# EAGLE board PcbArtiom.fsch v33 (EAGLE 9.7.0)
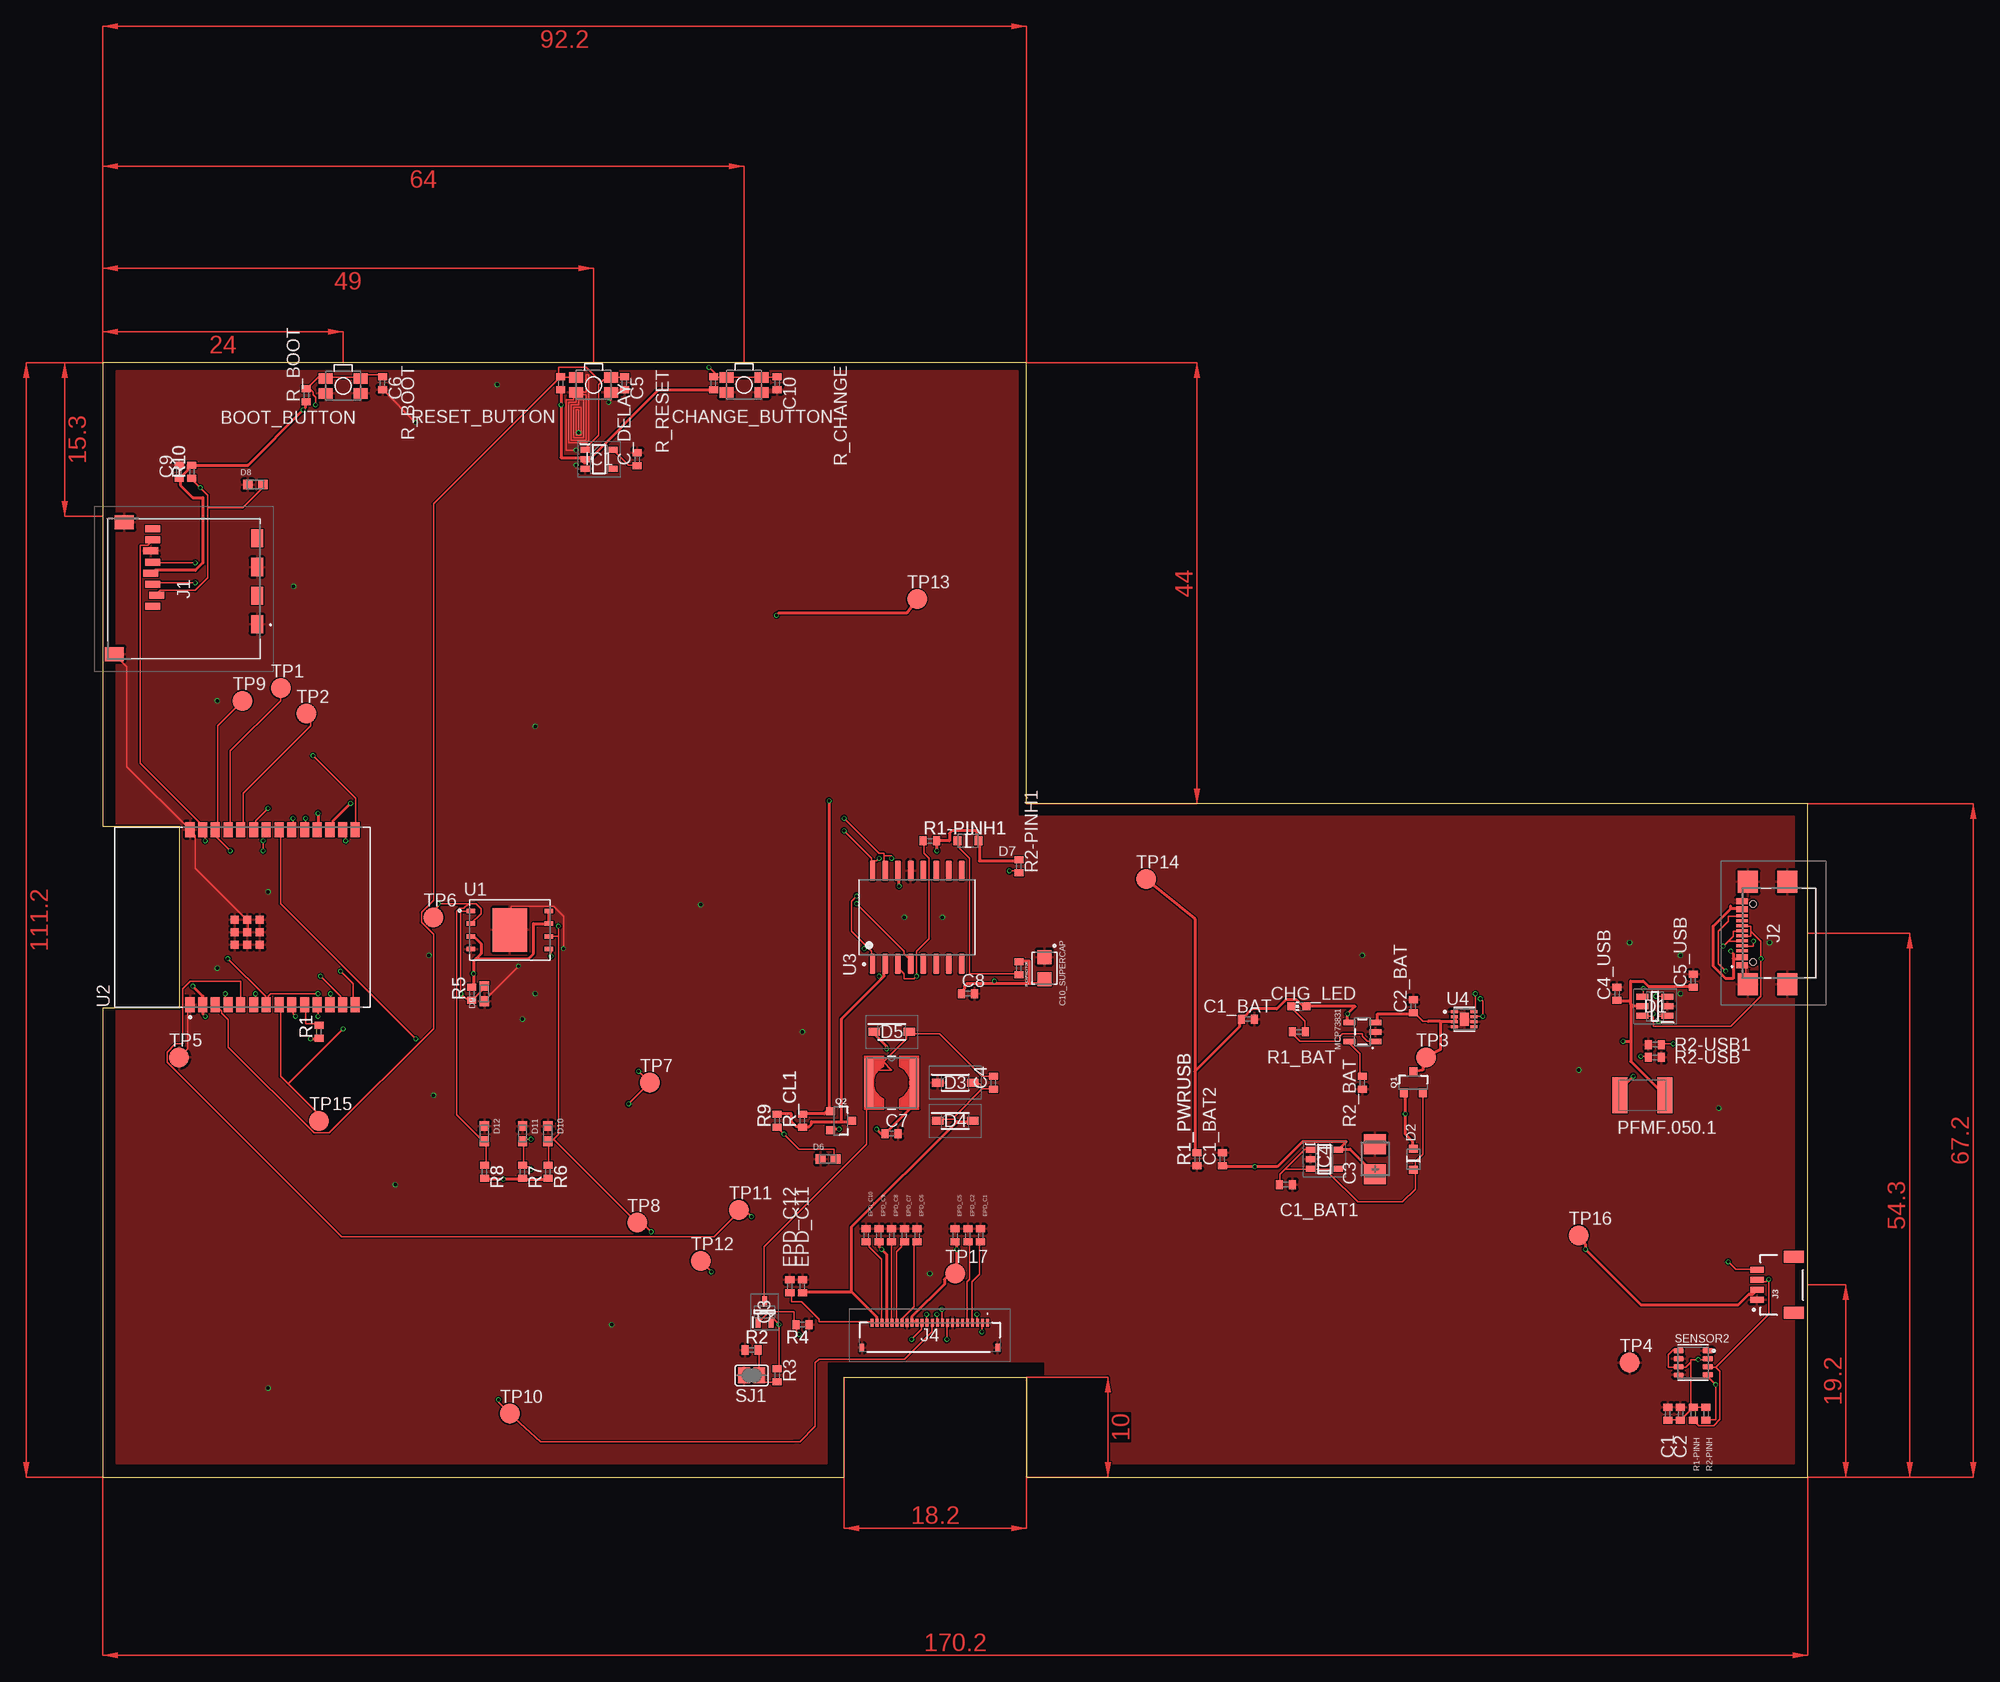
[diagram p0: board, top side]
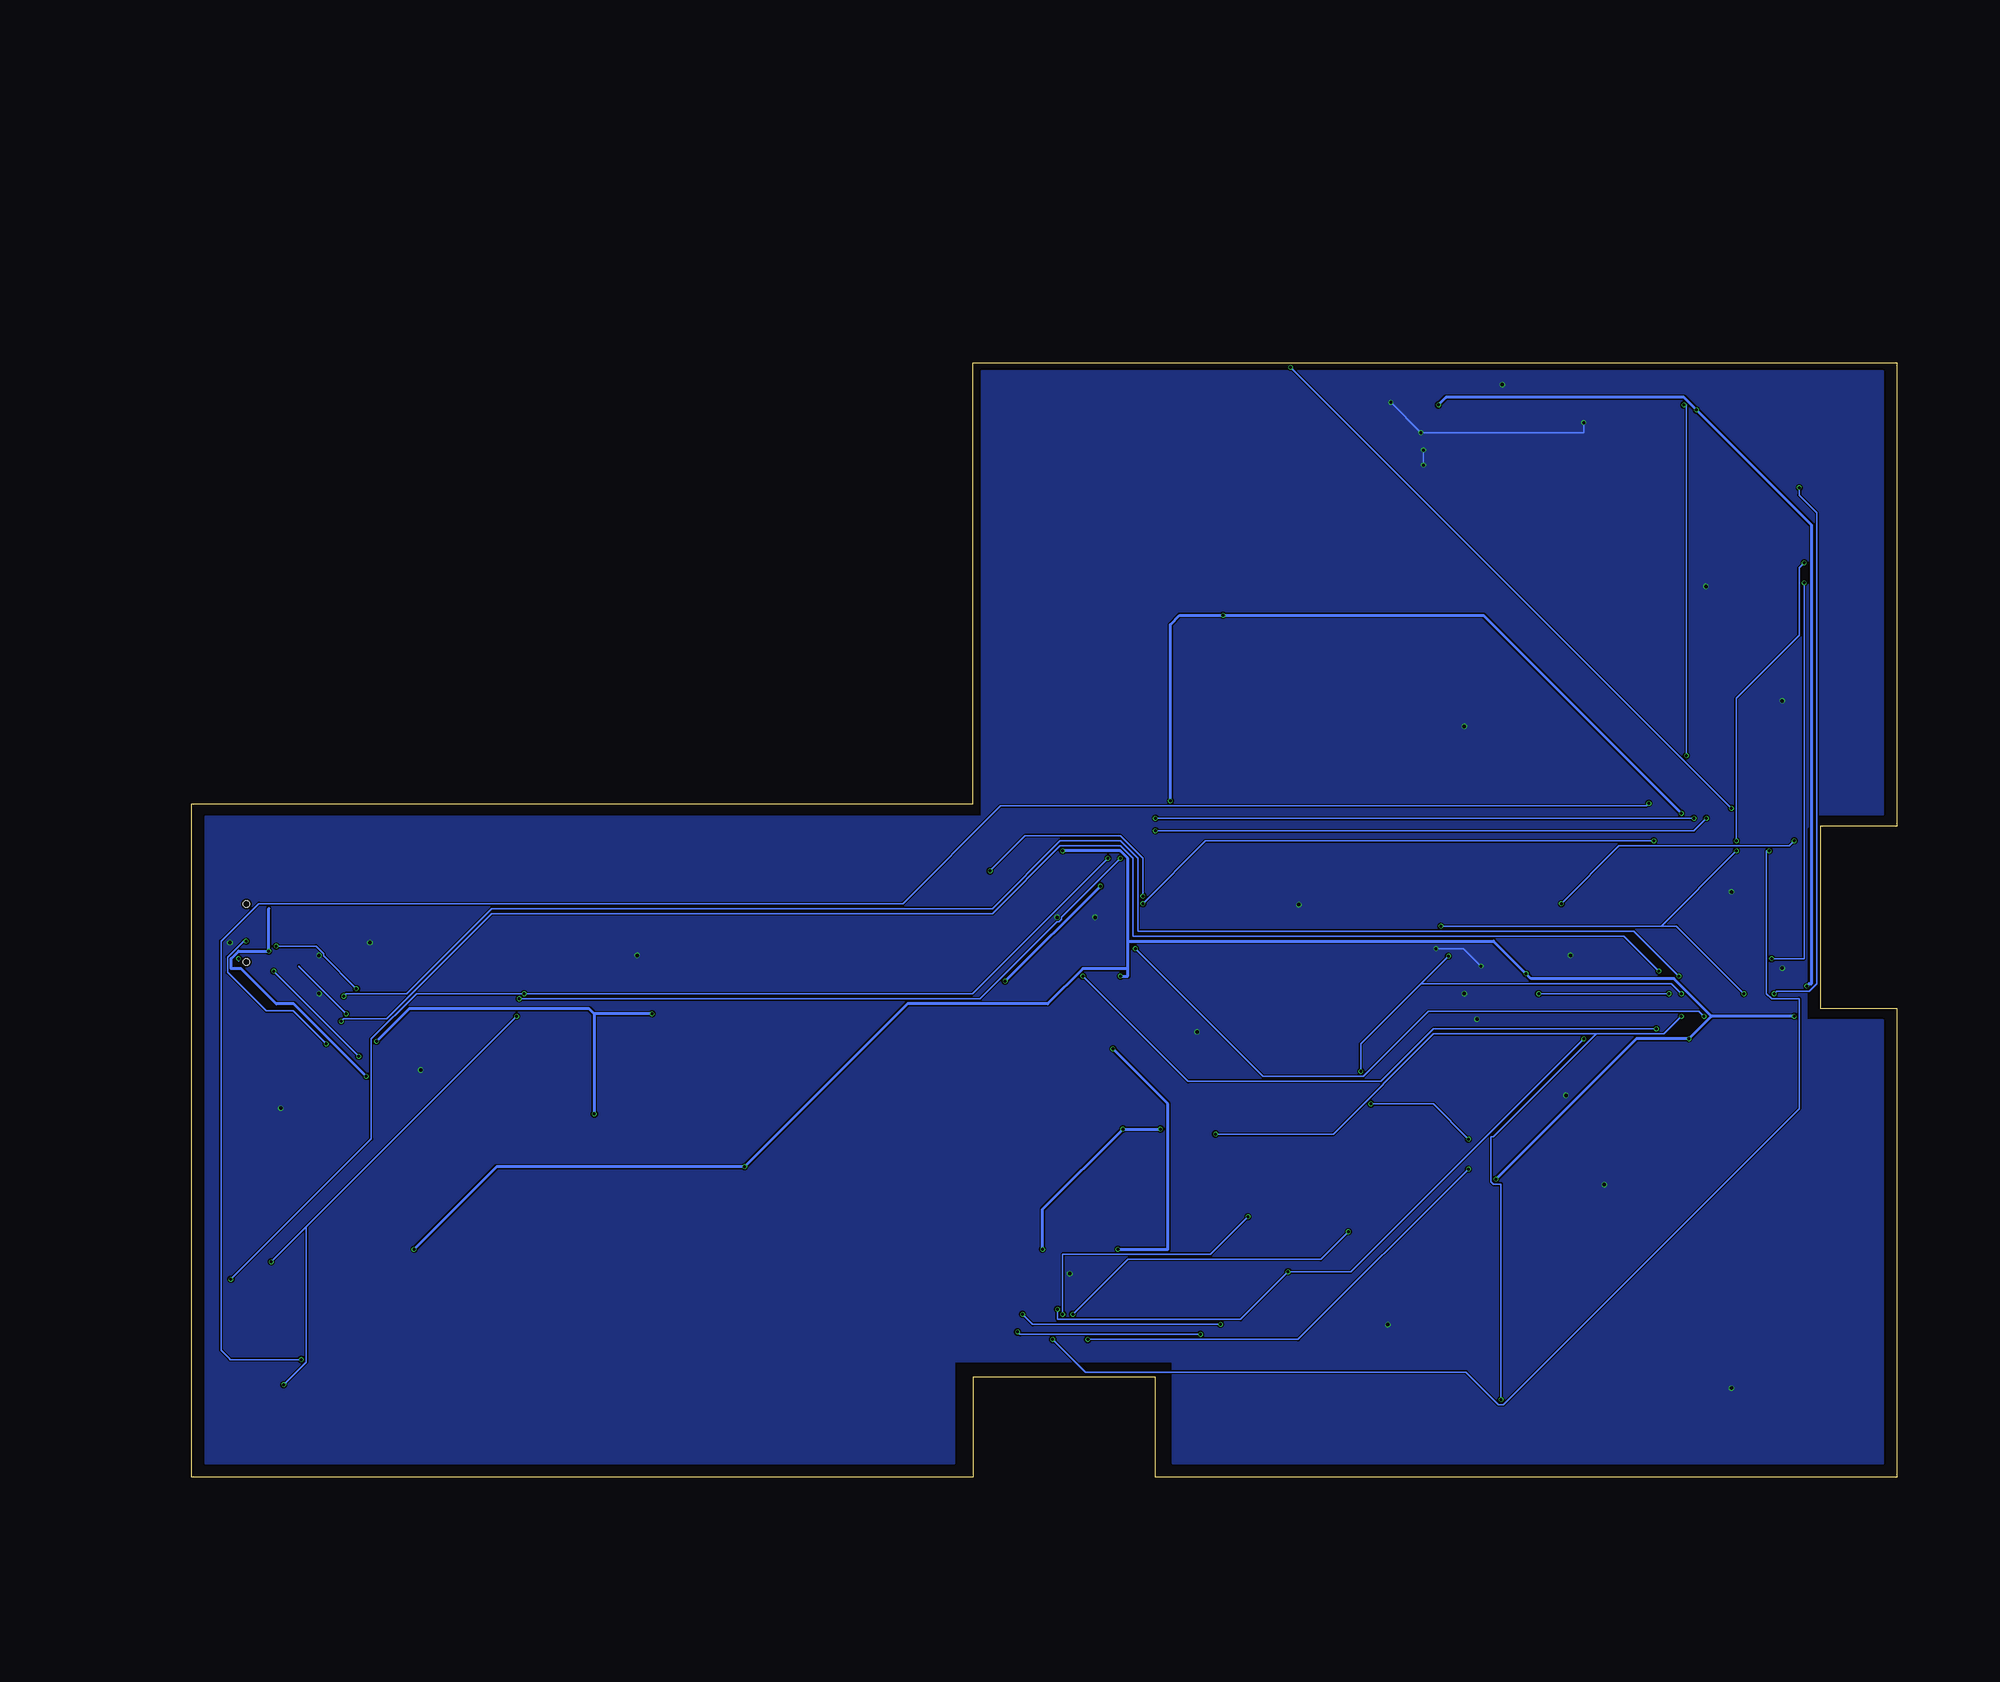
[diagram p1: board, bottom side, seen from below]

Size 170.2 x 111.2 mm. Coordinates in mm from the lower left corner, seen from the top.
Outline: 0,0 74,0 74,10 92.2,10 92.2,0 170.2,0 170.2,67.2 92.2,67.2 92.2,111.2 0,111.2 0,64.94 7.62,64.94 7.62,46.82 0,46.82 0,0
Copper layers (1*16): Top 0.035mm / dielectric 1.6mm / Bottom 0.035mm
Design rules "jlcpcb-2layers.dru": minimum track width 5mil, minimum drill 0.3mm, track to track 5mil, track to pad 5mil, pad to pad 5mil, via to via 5mil, smd to smd 5mil, copper to edge 0.2mm, drill to drill 6mil, minimum pad ring 10mil, minimum via ring 3mil, stop-mask expansion 4mil, vias tented up to drill 0mil, thermal gap 10mil
Net classes: 0 default: width 0.15 mm; 1 power: width 0.3 mm

## Footprints (pad centres in the part's own frame; a part is rotated, then mirrored left to right if it is on the bottom)
MYBUTTON = smd 1.4 x 1.05: 1 1.75,0.75; 2 -1.75,0.75; 3 -1.75,-0.75; 4 1.75,-0.75
ESP32_WROVER_EAGLE-LTSPICE_C0402 = smd 0.7 x 0.9: 1 -0.65,0; 2 0.65,0
EAGLE-LTSPICE_C0402 = smd 0.7 x 0.9: 1 -0.65,0; 2 0.65,0
RCL_CT3528 = smd 2 x 2.2: + -1.5,0; - 1.5,0
CAPCP3225X100N = smd 1.4 x 1.4: 1 -1.1,0; 2 1.1,0
ADAFRUIT_CHIP-LED0603 = smd 0.8 x 0.8: A 0,-0.75; C 0,0.75
SOT95P280X145-6N = smd 1.2 x 0.6: 1 -1.25,0.95; 2 -1.25,0; 3 -1.25,-0.95; 4 1.25,-0.95; 5 1.25,0; 6 1.25,0.95
ESP32_WROVER_AVX---SD0805S020S1R0_AVX_SD0805S020S1R0_0 = smd 0.8 x 0.9: 1 -1.05,0; 2 1.05,0
SOD3716X135N = smd 1.15 x 0.8: 1 -1.75,0; 2 1.75,0
DIOC1608X36N = smd 0.97 x 0.94: 1 -0.75,0; 2 0.75,0
SOT95P280X125-5N = smd 0.9 x 0.6: 1 -1.4,0.95; 2 -1.4,0; 3 -1.4,-0.95; 4 1.4,-0.95; 5 1.4,0.95
SOT95P280X120-5N = smd 0.9 x 0.6: 1 -1.4,0.95; 2 -1.4,0; 3 -1.4,-0.95; 4 1.4,-0.95; 5 1.4,0.95
112ATAARR03ATTEND = smd 1.8 x 1.2: G1 10.6,10.4; G2 4.9,10.4; S1 7.75,10.4; S2 2.05,10.4 | smd 1.4 x 1.9: G3 13.6,-3.85; G4 0.45,-2.85 | smd 0.7 x 1.5: P1 8.8,0; P2 7.7,0.4; P3 6.6,0; P4 5.5,-0.2; P5 4.4,0; P6 3.3,-0.2; P7 2.2,0; P8 1.1,0
SAMACSYS_PARTS_USB4110GFA = smd 0.3 x 1.15: A1 -3.35,3.678; A4 -2.55,3.678; A5 -1.25,3.678; A6 -0.25,3.678; A7 0.25,3.678; A8 1.25,3.678; A9 2.55,3.678; A12 3.35,3.678; B1 3.05,3.678; B4 2.25,3.678; B5 1.75,3.678; B6 0.75,3.678; B7 -0.75,3.678; B8 -1.75,3.678; B9 -2.25,3.678; B12 -3.05,3.678 | smd 2.18 x 2: MP1 -5.11,-0.827; MP2 5.11,-0.827; MP3 -5.11,3.103; MP4 5.11,3.103 | hole 0.65: -2.89,2.603; 2.89,2.603
JST04_1MM_RA = smd 0.6 x 1.35: 1 -1.5,0; 2 -0.5,0; 3 0.5,0; 4 1.5,0 | smd 1.2 x 2: NC1 2.8,-3.675; NC2 -2.8,-3.675
FH34SRJ24S05SH99 = smd 0.3 x 0.8: 1 5.75,1.45; 2 5.25,1.45; 3 4.75,1.45; 4 4.25,1.45; 5 3.75,1.45; 6 3.25,1.45; 7 2.75,1.45; 8 2.25,1.45; 9 1.75,1.45; 10 1.25,1.45; 11 0.75,1.45; 12 0.25,1.45; 13 -0.25,1.45; 14 -0.75,1.45; 15 -1.25,1.45; 16 -1.75,1.45; 17 -2.25,1.45; 18 -2.75,1.45; 19 -3.25,1.45; 20 -3.75,1.45; 21 -4.25,1.45; 22 -4.75,1.45; 23 -5.25,1.45; 24 -5.75,1.45 | smd 0.4 x 0.8: MP1 6.75,-1.05; MP2 -6.75,-1.05
IND_4828-WE-TPC_WRE = smd 0.889 x 4.826: 1 -2.286,0; 2 2.286,0
ESP32_WROVER_SPARKFUN-IC-POWER_SOT23-5 = smd 0.55 x 1.2: 1 -0.95,-1.3; 2 0,-1.3; 3 0.95,-1.3; 4 0.95,1.3; 5 -0.95,1.3
ESP32C6_VARISTOR_CT/CN1812 = smd 1.5 x 3.6: 1 -2.25,0; 2 2.25,0
ESP32_WROVER_SPARKFUN-DISCRETESEMI_SOT23-3 = smd 0.8 x 0.9: 1 -0.95,-1; 2 0.95,-1; 3 0,1.1
SOT65P210X110-3N = smd 1.05 x 0.5: 1 -1.05,0.65; 2 -1.05,-0.65; 3 1.05,0
ESP32_WROVER_EAGLE-LTSPICE_R0402 = smd 0.7 x 0.9: 1 -0.65,0; 2 0.65,0
ESP32_WROVER_BME680_PSON80P300X300X100-8N = smd 1.016 x 0.5: 1 1.458,1.2; 2 1.458,0.4; 3 1.458,-0.4; 4 1.458,-1.2; 5 -1.458,-1.22; 6 -1.458,-0.4; 7 -1.458,0.4; 8 -1.458,1.2
SJ = smd 1.168 x 1.6: 1 -0.762,0; 2 0.762,0
TP20R = smd 2 x 2: TP 0,0
SON127P600X800X80-9N = smd 0.94 x 0.44: 1 -3.895,1.905; 2 -3.895,0.635; 3 -3.895,-0.635; 4 -3.895,-1.905; 5 3.895,-1.905; 6 3.895,-0.635; 7 3.895,0.635; 8 3.895,1.905 | smd 3.4 x 4.3: 9 0,0
XCVR_ESP32-C6-WROOM-1-N8 = smd 1.5 x 0.9: 1 -8.75,5.26; 2 -8.75,3.99; 3 -8.75,2.72; 4 -8.75,1.45; 5 -8.75,0.18; 6 -8.75,-1.09; 7 -8.75,-2.36; 8 -8.75,-3.63; 9 -8.75,-4.9; 10 -8.75,-6.17; 11 -8.75,-7.44; 12 -8.75,-8.71; 13 -8.75,-9.98; 14 -8.75,-11.25; 15 8.75,-11.25; 16 8.75,-9.98; 17 8.75,-8.71; 18 8.75,-7.44; 19 8.75,-6.17; 20 8.75,-4.9; 21 8.75,-3.63; 22 8.75,-2.36; 23 8.75,-1.09; 24 8.75,0.18; 25 8.75,1.45; 26 8.75,2.72; 27 8.75,3.99; 28 8.75,5.26 | smd 0.8 x 0.8: 29_1 -2.755,0.79; 29_2 -1.505,0.79; 29_3 -0.255,0.79; 29_4 -2.755,-0.46; 29_5 -1.505,-0.46; 29_6 -0.255,-0.46; 29_7 -2.755,-1.71; 29_8 -1.505,-1.71; 29_9 -0.255,-1.71
SOIC127P1032X265-16N = smd 2.05 x 0.59: 1 -4.655,4.445; 2 -4.655,3.175; 3 -4.655,1.905; 4 -4.655,0.635; 5 -4.655,-0.635; 6 -4.655,-1.905; 7 -4.655,-3.175; 8 -4.655,-4.445; 9 4.655,-4.445; 10 4.655,-3.175; 11 4.655,-1.905; 12 4.655,-0.635; 13 4.655,0.635; 14 4.655,1.905; 15 4.655,3.175; 16 4.655,4.445
SON50P200X200X80-9N = smd 0.76 x 0.27: 1 -0.985,0.75; 2 -0.985,0.25; 3 -0.985,-0.25; 4 -0.985,-0.75; 5 0.985,-0.75; 6 0.985,-0.25; 7 0.985,0.25; 8 0.985,0.75 | smd 0.9 x 1.3: 9 0,0

## Placement (x,y rotation side)
BOOT_BUTTON  BUTTON_CUSYOMV1  [MYBUTTON]  24,108.91 180 top
C1  100nF  [ESP32_WROVER_EAGLE-LTSPICE_C0402]  156.21,6.35 90 top
C1_BAT  4.7uF  [ESP32_WROVER_EAGLE-LTSPICE_C0402]  114.3,45.72 0 top
C1_BAT1  4.7uF  [EAGLE-LTSPICE_C0402]  118.11,29.21 0 top
C1_BAT2  4.7uF  [EAGLE-LTSPICE_C0402]  111.76,31.75 90 top
C2  100nF  [ESP32_WROVER_EAGLE-LTSPICE_C0402]  157.48,6.35 90 top
C2_BAT  4.7uF  [ESP32_WROVER_EAGLE-LTSPICE_C0402]  130.81,46.99 90 top
C3  100uF TANT  [RCL_CT3528]  127,31.75 90 top
C4  4.7uF/25V  [ESP32_WROVER_EAGLE-LTSPICE_C0402]  88.9,39.37 90 top
C4_USB  100nF  [ESP32_WROVER_EAGLE-LTSPICE_C0402]  151.13,48.26 90 top
C5  1uF  [ESP32_WROVER_EAGLE-LTSPICE_C0402]  52.07,109.18 270 top
C5_USB  4.7uF  [ESP32_WROVER_EAGLE-LTSPICE_C0402]  158.75,49.53 90 top
C6  100uF  [ESP32_WROVER_EAGLE-LTSPICE_C0402]  27.94,109.18 270 top
C7  10uF  [ESP32_WROVER_EAGLE-LTSPICE_C0402]  78.74,34.29 0 top
C8  100nF  [ESP32_WROVER_EAGLE-LTSPICE_C0402]  86.36,48.26 0 top
C9  100nF  [EAGLE-LTSPICE_C0402]  7.62,100.33 90 top
C10  100uF  [ESP32_WROVER_EAGLE-LTSPICE_C0402]  67.31,109.18 270 top
C10_SUPERCAP  CPH3225A  [CAPCP3225X100N]  93.98,50.8 270 top
C_DELAY  100nF  [EAGLE-LTSPICE_C0402]  53.34,101.6 90 top
CHANGE_BUTTON  BUTTON_CUSYOMV1  [MYBUTTON]  64.01,109 180 top
CHG_LED  [ADAFRUIT_CHIP-LED0603]  119.38,46.99 90 top
D1  USBLC6-2SC6Y  [SOT95P280X145-6N]  154.94,46.99 180 top
D2  ESP32_WROVER_AVX---SD0805S020S1R0_AVX_SD0805S020S1R0_0_0AVX_SD0805S020S1R0_0_0  [ESP32_WROVER_AVX---SD0805S020S1R0_AVX_SD0805S020S1R0_0]  130.81,31.75 90 top
D3  MBR0530  [SOD3716X135N]  85.09,39.37 0 top
D4  MBR0530  [SOD3716X135N]  85.09,35.56 0 top
D5  MBR0530  [SOD3716X135N]  78.74,44.45 0 top
D6  PGB1010603MR  [DIOC1608X36N]  72.39,31.75 0 top
D7  ESP32_WROVER_AVX---SD0805S020S1R0_AVX_SD0805S020S1R0_0_0AVX_SD0805S020S1R0_0_0  [ESP32_WROVER_AVX---SD0805S020S1R0_AVX_SD0805S020S1R0_0]  86.36,63.5 0 top
D8  PGB1010603MR  [DIOC1608X36N]  15.24,99.06 0 top
D9  PGB1010603MR  [DIOC1608X36N]  38.1,48.26 90 top
D10  PGB1010603MR  [DIOC1608X36N]  44.45,34.29 270 top
D11  PGB1010603MR  [DIOC1608X36N]  41.91,34.29 270 top
D12  PGB1010603MR  [DIOC1608X36N]  38.1,34.29 270 top
EPD_C1  1uF/50V  [ESP32_WROVER_EAGLE-LTSPICE_C0402]  87.63,24.13 90 top
EPD_C2  1uF/50V  [ESP32_WROVER_EAGLE-LTSPICE_C0402]  86.36,24.13 90 top
EPD_C5  0.1uF/50V  [ESP32_WROVER_EAGLE-LTSPICE_C0402]  85.09,24.13 90 top
EPD_C6  1uF/50V  [ESP32_WROVER_EAGLE-LTSPICE_C0402]  81.28,24.13 90 top
EPD_C7  1uF/50V  [ESP32_WROVER_EAGLE-LTSPICE_C0402]  80.01,24.13 90 top
EPD_C8  1uF/50V  [ESP32_WROVER_EAGLE-LTSPICE_C0402]  78.74,24.13 90 top
EPD_C9  1uF/50V  [ESP32_WROVER_EAGLE-LTSPICE_C0402]  77.47,24.13 90 top
EPD_C10  1uF/50V  [ESP32_WROVER_EAGLE-LTSPICE_C0402]  76.2,24.13 90 top
EPD_C11  1uF/50V  [ESP32_WROVER_EAGLE-LTSPICE_C0402]  69.85,19.05 90 top
EPD_C12  1uF/50V  [ESP32_WROVER_EAGLE-LTSPICE_C0402]  68.58,19.05 90 top
IC1  BD5229G-TR  [SOT95P280X125-5N]  49.53,101.6 0 top
IC4  XC6220A331MR-G  [SOT95P280X120-5N]  121.92,31.75 0 top
J1  112A-TAAR-R03_ATTEND  [112ATAARR03ATTEND]  5,95.73 270 top
J2  SAMACSYS_PARTS_USB4110-GF-A  [SAMACSYS_PARTS_USB4110GFA]  167.32,54.3 90 top
J3  QWIIC_RIGHT_ANGLE  [JST04_1MM_RA]  165.1,19.2 90 top
J4  FH34SRJ-24S-0.5SH_99_  [FH34SRJ24S05SH99]  82.55,13.97 0 top
L1  68uH  [IND_4828-WE-TPC_WRE]  78.74,39.37 0 top
MCP73831  ESP32_WROVER_SPARKFUN-IC-POWER_MCP73831  [ESP32_WROVER_SPARKFUN-IC-POWER_SOT23-5]  125.73,44.45 90 top
PFMF.050.1  ESP32C6_VARISTORCN1812  [ESP32C6_VARISTOR_CT/CN1812]  153.67,38.1 0 top
Q1  20V/4.2A/52mΩ/1.4W  [ESP32_WROVER_SPARKFUN-DISCRETESEMI_SOT23-3]  130.81,39.37 0 top
Q2  20V/4.2A/52mΩ/1.4W  [ESP32_WROVER_SPARKFUN-DISCRETESEMI_SOT23-3]  73.66,35.56 270 top
Q3  SI1308EDL-T1-GE3  [SOT65P210X110-3N]  66.04,16.51 90 top
R1  10k  [ESP32_WROVER_EAGLE-LTSPICE_R0402]  21.59,44.45 90 top
R1-PINH  10K  [ESP32_WROVER_EAGLE-LTSPICE_R0402]  158.75,6.35 90 top
R1-PINH1  10K  [ESP32_WROVER_EAGLE-LTSPICE_R0402]  82.55,63.5 0 top
R1_BAT  200  [ESP32_WROVER_EAGLE-LTSPICE_R0402]  119.38,44.45 0 top
R1_PWRUSB  100K  [ESP32_WROVER_EAGLE-LTSPICE_R0402]  109.22,31.75 90 top
R2  2.2  [ESP32_WROVER_EAGLE-LTSPICE_R0402]  64.77,12.7 0 top
R2-PINH  10K  [ESP32_WROVER_EAGLE-LTSPICE_R0402]  160.02,6.35 90 top
R2-PINH1  10K  [ESP32_WROVER_EAGLE-LTSPICE_R0402]  91.44,60.96 90 top
R2-USB  5k1  [ESP32_WROVER_EAGLE-LTSPICE_R0402]  154.94,41.91 0 top
R2-USB1  5k1  [ESP32_WROVER_EAGLE-LTSPICE_R0402]  154.94,43.18 0 top
R2_BAT  2K  [ESP32_WROVER_EAGLE-LTSPICE_R0402]  125.73,39.37 90 top
R3  0.47  [ESP32_WROVER_EAGLE-LTSPICE_R0402]  67.31,10.16 90 top
R4  10k  [ESP32_WROVER_EAGLE-LTSPICE_R0402]  69.85,15.24 180 top
R5  10K  [ESP32_WROVER_EAGLE-LTSPICE_R0402]  36.83,48.26 90 top
R6  10K  [ESP32_WROVER_EAGLE-LTSPICE_R0402]  44.45,30.48 270 top
R7  10K  [ESP32_WROVER_EAGLE-LTSPICE_R0402]  41.91,30.48 270 top
R8  10K  [ESP32_WROVER_EAGLE-LTSPICE_R0402]  38.1,30.48 270 top
R9  10K  [ESP32_WROVER_EAGLE-LTSPICE_R0402]  67.31,35.56 90 top
R10  10K  [ESP32_WROVER_EAGLE-LTSPICE_R0402]  8.89,100.33 90 top
R_BOOT  10k  [ESP32_WROVER_EAGLE-LTSPICE_R0402]  20.32,107.95 90 top
R_CAPACITOR  15  [ESP32_WROVER_EAGLE-LTSPICE_R0402]  91.44,50.8 270 top
R_CHANGE  10K  [ESP32_WROVER_EAGLE-LTSPICE_R0402]  60.96,109.18 90 top
R_CL1  10K  [ESP32_WROVER_EAGLE-LTSPICE_R0402]  69.85,35.56 90 top
R_RESET  10k  [ESP32_WROVER_EAGLE-LTSPICE_R0402]  45.72,109.18 90 top
RESET_BUTTON  BUTTON_CUSYOMV1  [MYBUTTON]  49,109 180 top
SENSOR2  ESP32_WROVER_BME680_BME680  [ESP32_WROVER_BME680_PSON80P300X300X100-8N]  158.75,11.43 0 top
SJ1  [SJ]  64.77,10.16 0 top
TP1  TPTP20R  [TP20R]  17.78,78.74 0 top
TP2  TPTP20R  [TP20R]  20.32,76.2 0 top
TP3  TPTP20R  [TP20R]  132.08,41.91 0 top
TP4  TPTP20R  [TP20R]  152.4,11.43 0 top
TP5  TPTP20R  [TP20R]  7.62,41.91 0 top
TP6  TPTP20R  [TP20R]  33.02,55.88 0 top
TP7  TPTP20R  [TP20R]  54.61,39.37 0 top
TP8  TPTP20R  [TP20R]  53.34,25.4 0 top
TP9  TPTP20R  [TP20R]  13.97,77.47 0 top
TP10  TPTP20R  [TP20R]  40.64,6.35 0 top
TP11  TPTP20R  [TP20R]  63.5,26.67 0 top
TP12  TPTP20R  [TP20R]  59.69,21.59 0 top
TP13  TPTP20R  [TP20R]  81.28,87.63 0 top
TP14  TPTP20R  [TP20R]  104.14,59.69 0 top
TP15  TPTP20R  [TP20R]  21.59,35.56 0 top
TP16  TPTP20R  [TP20R]  147.32,24.13 0 top
TP17  TPTP20R  [TP20R]  85.09,20.32 0 top
U1  W25Q512JVEIQ  [SON127P600X800X80-9N]  40.64,54.61 0 top
U2  ESP32-C6-WROOM-1-N8  [XCVR_ESP32-C6-WROOM-1-N8]  13.97,55.88 90 top
U3  DS3231SN#  [SOIC127P1032X265-16N]  81.28,55.88 90 top
U4  MAX17048G+T10  [SON50P200X200X80-9N]  135.89,45.72 0 top

## Library data of the parts
BOOT_BUTTON CHANGE_BUTTON CHG_LED PFMF.050.1 RESET_BUTTON SJ1 TP1-TP17 = DeskAssistant_v19_v1
C1 C1_BAT C1_BAT1 C1_BAT2 C2 C2_BAT C4 C4_USB C5 C5_USB C6-C10 C_DELAY EPD_C1 EPD_C2 EPD_C5-EPD_C12 = DeskAssistant_v19_v1; SPICEMODEL: NONE; SPICEPREFIX: C
C3 = DeskAssistant_v19_v1; SPICEPREFIX: C
C10_SUPERCAP = DeskAssistant_v19_v1; AVAILABILITY: Not in stock; CHECK_PRICES: https://www.snapeda.com/parts/CPH3225A/Seiko+Instruments/view-part/?ref=eda; DESCRIPTION: 11 mF (EDLC) Supercapacitor 3.3 V 1210 (3225 Metric) - -; MF: Seiko Instruments; MP: CPH3225A; PACKAGE: 1210 Seiko; PRICE: None; PURCHASE-URL: https://www.snapeda.com/api/url_track_click_mouser/?unipart_id=562593&manufacturer=Seiko Instruments&part_name=CPH3225A&search_term=None; SNAPEDA_LINK: https://www.snapeda.com/parts/CPH3225A/Seiko+Instruments/view-part/?ref=snap
D1 = DeskAssistant_v19_v1; AVAILABILITY: In Stock; CHECK_PRICES: https://www.snapeda.com/parts/USBLC6-2SC6Y/STMicroelectronics/view-part/?ref=eda; DESCRIPTION: 17V Clamp 5A (8/20µs) Ipp Tvs Diode Surface Mount SOT-23-6; MF: STMicroelectronics; MP: USBLC6-2SC6Y; PACKAGE: SOT-23-6 STMicroelectronics; PRICE: None; SNAPEDA_LINK: https://www.snapeda.com/parts/USBLC6-2SC6Y/STMicroelectronics/view-part/?ref=snap
D2 D7 = DeskAssistant_v19_v1; CENTROID_NOT_SPECIFIED: No; DATASHEET: http://datasheets.avx.com/schottky.pdf; DIGIKEY_DESCRIPTION: DIODE SCHOTTKY 20V 1A 0805; DIGIKEY_PART_NUMBER: 478-7800-1-ND; LEAD_FREE: yes; MF: AVX; MOUSER_PART_NUMBER: 581-SD0805S020S1R0; PACKAGE: 0805 (2012 metric); PREFIX: D; ROHS: yes; TEMPERATURE_RANGE_HIGH: +125°C; TEMPERATURE_RANGE_LOW: -55°C
D3-D5 = DeskAssistant_v19_v1; AVAILABILITY: In Stock; CHECK_PRICES: https://www.snapeda.com/parts/MBR0530/Onsemi/view-part/?ref=eda; DESCRIPTION: Diode Schottky 30 V 500mA Surface Mount SOD-123; MF: ON Semiconductor; MP: MBR0530; PACKAGE: SOD-123-2 ON Semiconductor; PRICE: None; PURCHASE-URL: https://www.snapeda.com/api/url_track_click_mouser/?unipart_id=179458&manufacturer=ON Semiconductor&part_name=MBR0530&search_term=None; SNAPEDA_LINK: https://www.snapeda.com/parts/MBR0530/Onsemi/view-part/?ref=snap
D6 D8-D12 = DeskAssistant_v19_v1; AVAILABILITY: In Stock; CHECK_PRICES: https://www.snapeda.com/parts/PGB1010603MR/Littelfuse/view-part/?ref=eda; DESCRIPTION: 150V (Typ) Clamp - Ipp Tvs Diode Surface Mount 0603 (1608 Metric); MF: Littelfuse Inc.; MP: PGB1010603MR; PACKAGE: 0603 Littelfuse Inc.; PRICE: None; PURCHASE-URL: https://www.snapeda.com/api/url_track_click_mouser/?unipart_id=5659453&manufacturer=Littelfuse Inc.&part_name=PGB1010603MR&search_term=None; SNAPEDA_LINK: https://www.snapeda.com/parts/PGB1010603MR/Littelfuse/view-part/?ref=snap
IC1 = DeskAssistant_v19_v1; DESCRIPTION: Voltage Detector with Adjustable Delay Time: CMOS processes are utilized to develop high precision, low current consumption CMOS reset ICs that allow arbitrary setting of the delay time. The extensive lineup includes both Nch Open Drain and CMOS output types in a wide range of detection voltages (from 2.3V to 6.0V, in 0.1V steps), enabling selection of the ideal solution based on customer requirements. In addition, the entire series is of course both lead-free and RoHS-compliant.; HEIGHT: 1.25mm; MANUFACTURER_NAME: ROHM Semiconductor; MANUFACTURER_PART_NUMBER: BD5229G-TR; MOUSER_PART_NUMBER: 755-BD5229G-TR; MOUSER_PRICE-STOCK: https://www.mouser.co.uk/ProductDetail/ROHM-Semiconductor/BD5229G-TR?qs=4kLU8WoGk0vvnhrrYwdszw%3D%3D
IC4 = DeskAssistant_v19_v1; DESCRIPTION: LDO Voltage Regulators; HEIGHT: 1.2mm; MANUFACTURER_NAME: Torex; MANUFACTURER_PART_NUMBER: XC6220A331MR-G; MOUSER_PART_NUMBER: 865-XC6220A331MR-G; MOUSER_PRICE-STOCK: https://www.mouser.co.uk/ProductDetail/Torex-Semiconductor/XC6220A331MR-G?qs=AsjdqWjXhJ8ZSWznL1J0gg%3D%3D
J1 = DeskAssistant_v19_v1; DESCRIPTION: Micro SD Card Socket, Push-Push Type, Top Mount, SMT, H=1.83mm, 10u; HEIGHT: 1.9mm; MANUFACTURER_NAME: ATTEND; MANUFACTURER_PART_NUMBER: 112A-TAAR-R03 ATTEND
J2 = DeskAssistant_v19_v1; DESCRIPTION: CONN USB 2.0 TYPE-C R/A SMT; HEIGHT: 3.26mm; MANUFACTURER_NAME: GCT (GLOBAL CONNECTOR TECHNOLOGY); MANUFACTURER_PART_NUMBER: USB4110-GF-A; MOUSER_PART_NUMBER: 640-USB4110-GF-A; MOUSER_PRICE-STOCK: https://www.mouser.co.uk/ProductDetail/GCT/USB4110-GF-A?qs=KUoIvG%2F9IlYiZvIXQjyJeA%3D%3D
J3 = DeskAssistant_v19_v1; PROD_ID: CONN-13694
J4 = DeskAssistant_v19_v1; DESCRIPTION: 24 Position FFC, FPC Connector Contacts, Top and Bottom 0.020" (0.50mm) Surface Mount, Right Angle; HEIGHT: 1.1mm; MANUFACTURER_NAME: Hirose; MANUFACTURER_PART_NUMBER: FH34SRJ-24S-0.5SH(99); MOUSER_PART_NUMBER: 798-FH34SRJ24S05SH99; MOUSER_PRICE-STOCK: https://www.mouser.co.uk/ProductDetail/Hirose-Connector/FH34SRJ-24S-0.5SH99?qs=vcbW%252B4%252BSTIpKBl5ap9J8Fw%3D%3D
L1 = DeskAssistant_v19_v1; COPYRIGHT: Copyright (C) 2024 Ultra Librarian. All rights reserved.; MANUFACTURER_PART_NUMBER: 744043680; MFR_NAME: Wurth Electronics
MCP73831 = DeskAssistant_v19_v1; PROD_ID: IC-09995
Q1 Q2 = DeskAssistant_v19_v1; PROD_ID: TRAN-14388
Q3 = DeskAssistant_v19_v1; AVAILABILITY: In Stock; CHECK_PRICES: https://www.snapeda.com/parts/SI1308EDL-T1-GE3/Vishay+Siliconix/view-part/?ref=eda; DESCRIPTION: Si1308EDL-T1-GE3 N-channel MOSFET Transistor, 1.5 A, 30 V, 3-Pin SC-70 | Siliconix / Vishay SI1308EDL-T1-GE3; MF: Vishay Siliconix; MP: SI1308EDL-T1-GE3; PACKAGE: SOT-323 Vishay Semiconductor; PRICE: None; PURCHASE-URL: https://www.snapeda.com/api/url_track_click_mouser/?unipart_id=274603&manufacturer=Vishay Siliconix&part_name=SI1308EDL-T1-GE3&search_term=None; SNAPEDA_LINK: https://www.snapeda.com/parts/SI1308EDL-T1-GE3/Vishay+Siliconix/view-part/?ref=snap
R1 R1-PINH R1-PINH1 R1_BAT R1_PWRUSB R2 R2-PINH R2-PINH1 R2-USB R2-USB1 R2_BAT R3-R10 R_BOOT R_CAPACITOR R_CHANGE R_CL1 R_RESET = DeskAssistant_v19_v1; SPICEMODEL: NONE; SPICEPREFIX: R
SENSOR2 = DeskAssistant_v19_v1; AVAILABILITY: Unavailable; DESCRIPTION: Integrated Environmental Unit; MF: Bosch Sensortec; MP: BME680; PACKAGE: LGA-8 Bosch Tools; PRICE: None
U1 = DeskAssistant_v19_v1; AVAILABILITY: In Stock; CHECK_PRICES: https://www.snapeda.com/parts/W25Q512JVEIQ/Winbond+Electronics/view-part/?ref=eda; DESCRIPTION: FLASH - NOR Memory IC 512Mb (64M x 8) SPI - Quad I/O 133 MHz 8-WSON (8x6); MF: Winbond Electronics; MP: W25Q512JVEIQ; PACKAGE: Package; PRICE: None; SNAPEDA_LINK: https://www.snapeda.com/parts/W25Q512JVEIQ/Winbond+Electronics/view-part/?ref=snap
U2 = DeskAssistant_v19_v1; AVAILABILITY: In Stock; CHECK_PRICES: https://www.snapeda.com/parts/ESP32-C6-WROOM-1-N8/Espressif+Systems/view-part/?ref=eda; DESCRIPTION: Multiprotocol Modules ESP32-C6 module, Wi-Fi 6 in 2.4 GHz band, Bluetooth 5, Zigbee 3.0 and Thread. ESP34-WROOM Compatible - ENGINEERING SAMPLE; MF: Espressif Systems; MP: ESP32-C6-WROOM-1-N8; PACKAGE: None; PRICE: None; SNAPEDA_LINK: https://www.snapeda.com/parts/ESP32-C6-WROOM-1-N8/Espressif+Systems/view-part/?ref=snap
U3 = DeskAssistant_v19_v1; AVAILABILITY: In Stock; CHECK_PRICES: https://www.snapeda.com/parts/DS3231SN%23/Analog+Devices/view-part/?ref=eda; DESCRIPTION: Extremely Accurate I²C-Integrated RTC/TCXO/Crystal; MF: Analog Devices; MP: DS3231SN#; PACKAGE: SOIC-16 Maxim; PRICE: None; PURCHASE-URL: https://www.snapeda.com/api/url_track_click_mouser/?unipart_id=99048&manufacturer=Analog Devices&part_name=DS3231SN#&search_term=None; SNAPEDA_LINK: https://www.snapeda.com/parts/DS3231SN%23/Analog+Devices/view-part/?ref=snap
U4 = DeskAssistant_v19_v1; AVAILABILITY: In Stock; CHECK_PRICES: https://www.snapeda.com/parts/MAX17048G+T10/Analog+Devices/view-part/?ref=eda; DESCRIPTION: 3µA 1-Cell/2-Cell Fuel Gauge with ModelGauge; MF: Analog Devices; MP: MAX17048G+T10; PACKAGE: TDFN-8 Maxim; PRICE: None; PURCHASE-URL: https://www.snapeda.com/api/url_track_click_mouser/?unipart_id=329239&manufacturer=Analog Devices&part_name=MAX17048G+T10&search_term=None; SNAPEDA_LINK: https://www.snapeda.com/parts/MAX17048G+T10/Analog+Devices/view-part/?ref=snap

## Nets
3V3 [power]: C1_BAT2.1 C3.+ C9.1 D7.2 IC1.2 IC4.5 J1.P4 J3.2 Q2.3 R1-PINH1.2 R1.1 R2-PINH1.2 R5.2 R6.2 R7.2 R8.2 R9.2 R10.2 R_BOOT.1 R_CHANGE.1 R_CL1.1 R_RESET.1 TP16.TP U1.3 U1.7 U1.8 U2.2 U3.2
32KHZ: R2-PINH1.1 U2.9 U3.1
DN: D1.4 J2.A7 J2.B7
DP: D1.6 J2.A6 J2.B6
EPD_3V3 [power]: C7.1 EPD_C5.1 J4.15 J4.16 L1.2 Q2.2 TP17.TP
EPD_3V3_C [power]: Q2.1 R_CL1.2 TP13.TP U2.18
EPD_BUSY: J4.9 TP9.TP U2.26
EPD_CS: D6.2 J4.12 R9.1 TP10.TP U2.11
EPD_DC: J4.11 TP11.TP U2.5
EPD_RST: J4.10 TP12.TP U2.21
FLASH_CS: D9.2 R5.1 U1.1 U2.12
GDR: J4.2 Q3.1 R4.2
GND: BOOT_BUTTON.1 BOOT_BUTTON.2 C1.2 C1_BAT1.2 C1_BAT2.2 C1_BAT.2 C2.2 C2_BAT.2 C3.- C4_USB.2 C5.2 C5_USB.2 C6.2 C7.2 C8.2 C9.2 C10.2 C10_SUPERCAP.1 C_DELAY.2 CHANGE_BUTTON.1 CHANGE_BUTTON.2 D1.2 D3.1 D6.1 D8.1 D9.1 D10.1 D11.1 D12.1 EPD_C1.2 EPD_C2.2 EPD_C5.2 EPD_C6.2 EPD_C7.2 EPD_C8.2 EPD_C9.2 EPD_C10.2 EPD_C11.2 EPD_C12.2 IC1.3 IC4.2 J1.G1 J1.G2 J1.G3 J1.G4 J1.P6 J2.A1 J2.A12 J2.B1 J2.B12 J2.MP1 J2.MP2 J2.MP3 J2.MP4 J3.1 J4.8 J4.17 J4.MP1 J4.MP2 MCP73831.2 R1_PWRUSB.1 R2-USB1.1 R2-USB.2 R2.1 R2_BAT.1 R4.1 RESET_BUTTON.1 RESET_BUTTON.2 SENSOR2.1 SENSOR2.5 SENSOR2.7 SJ1.1 TP4.TP TP5.TP U1.4 U1.9 U2.1 U2.28 U2.29_1 U2.29_2 U2.29_3 U2.29_4 U2.29_5 U2.29_6 U2.29_7 U2.29_8 U2.29_9 U3.13 U4.1 U4.4 U4.6 U4.9
GPIO8: R1.2 U2.10
I2C_PW: C1.1 C2.1 R1-PINH.2 R2-PINH.2 SENSOR2.2 SENSOR2.6 SENSOR2.8 U2.17
INT_RTC: R1-PINH1.1 TP15.TP U2.8 U3.3
IO/BOOT: BOOT_BUTTON.3 BOOT_BUTTON.4 C6.1 R_BOOT.2 U2.15
IO/CHANGE: C10.1 CHANGE_BUTTON.3 CHANGE_BUTTON.4 R_CHANGE.2 U2.23
MISO: D12.2 J1.P7 R8.1 TP6.TP U1.2 U2.27
MOSI: D11.2 J1.P3 J4.14 R7.1 TP7.TP U1.5 U2.7
N$1: C1_BAT1.1 D2.1 IC4.1 IC4.3 Q1.2
N$2: MCP73831.1 R1_BAT.1
N$3: CHG_LED.C R1_BAT.2
N$4: J2.B5 R2-USB.1
N$5: MCP73831.5 R2_BAT.2
N$6: D7.1 R_CAPACITOR.2
N$7: C_DELAY.1 IC1.5
N$10: EPD_C2.1 J4.5
N$11: J2.A5 R2-USB1.2
N$12: EPD_C1.1 J4.4
N$13: EPD_C6.1 J4.18
N$14: EPD_C7.1 J4.19
N$17: EPD_C8.1 J4.20
N$19: EPD_C10.1 J4.22
N$21: EPD_C12.1 J4.24
N$45: C4.1 D3.2 D4.1
PREVGH [power]: D5.1 EPD_C9.1 J4.21
PREVGL [power]: D4.2 EPD_C11.1 J4.23
RESE: J4.3 Q3.2 R3.2
RESE': R2.2 R3.1 SJ1.2
RESET: C5.1 IC1.1 R_RESET.2 RESET_BUTTON.3 RESET_BUTTON.4 U2.3
RTC_RST: U2.16 U3.4
RX: TP2.TP U2.24
SCK: D10.2 J1.P5 J4.13 R6.1 TP8.TP U1.6 U2.6
SCL: J3.4 R2-PINH.1 SENSOR2.4 U2.20 U3.16 U4.7
SDA: J3.3 R1-PINH.1 SENSOR2.3 U2.19 U3.15 U4.8
SRC: C4.2 D5.2 L1.1 Q3.3
SS_SD: D8.2 J1.P2 R10.1 U2.4
TX: TP1.TP U2.25
USB_D+: D1.1 U2.14
USB_D-: D1.3 U2.13
VBAT: C2_BAT.1 MCP73831.3 Q1.3 TP3.TP U4.2 U4.3
VBUS [power]: C1_BAT.1 C4_USB.1 C5_USB.1 CHG_LED.A D1.5 D2.2 MCP73831.4 PFMF.050.1.2 Q1.1 R1_PWRUSB.2 TP14.TP
VRTC [power]: C8.1 C10_SUPERCAP.2 R_CAPACITOR.1 U3.14
VUSB [power]: J2.A4 J2.A9 J2.B4 J2.B9 PFMF.050.1.1

## Tracks (layer width: path | path; a pad name or v marks a point on that pad's centre or on a via)
3V3  (via drill 0.3)
  Top 0.3: R_RESET.1 45.75,108.5 v45.75,107 45.75,101.75 48,101.75 IC1.2 48,101.5 48,101.25 48.25,101.25 55.5,108.5 60.75,108.5 R_CHANGE.1 | R_BOOT.1 20.25,107.25 20.25,106.75 v20,106.5 14.5,101 9,101 R10.2 8.75,101 8.5,101 8.5,100.5 7.75,99.75 C9.1 7.75,99.5 7.75,99 9,97.75 10,97.75 10,91.25 9.25,90.5 5.25,90.5 5,90.25 J1.P4 | 44.5,55.25 44.5,56.5 U1.8 | 37.25,51.75 37.75,52.25 37.75,53.25 37,54 36.75,54 U1.3 | 37.25,51.75 37,51.5 v37,50.25 37,49 R5.2 | 44.5,55.25 43,55.25 43,52.25 42.5,51.75 37.25,51.75 | 44.5,55.25 U1.7 | R8.2 38.25,29.75 v40,29.75 41.75,29.75 R7.2 42,29.75 44.25,29.75 R6.2 | v20.75,43.75 21.5,43.75 R1.1 | v10.25,46 10,46.25 10,47 U2.2 10,47.25 10,48 v9,49 | TP16.TP 147.5,24 147.5,23.75 148,23.25 v148,22.75 153.52,17.23 163.26,17.23 164.31,18.28 164.68,18.28 J3.2 | C1_BAT2.1 112,31 v115,31 117.25,31 119.75,33.5 124.12,33.5 IC4.5 123.5,32.75 124.5,32.75 C3.+ | 83.25,63.5 84.5,63.5 84.5,64.25 84.75,64.5 87.25,64.5 87.25,63.5 D7.2 87.5,63.5 87.5,61.5 91.25,61.5 R2-PINH1.2 | R9.2 67.5,36.25 68.75,36.25 68.75,35.5 69.25,35 69.75,35 R_CL1.1 70,35 70.5,35 70.75,35.25 70.75,35.5 73.75,35.5 | 73.75,35.5 74.75,35.5 Q2.3 | 77.75,49.75 73.75,45.75 73.75,35.5 | 77.75,49.75 78,50 78,51 U3.2 | v83.25,62.5 83.25,63.5 | 77.75,49.75 v77.5,50 | 83.25,63.5 R1-PINH1.2
  Bottom 0.3: v45.75,107 45,107.75 21.25,107.75 v20,106.5 8.5,95 8.5,49.25 8.75,49.25 v9,49 | 18.5,46 v20.75,43.75 26,43.75 v40,29.75 | v10.25,46 18.5,46 | 18.5,46 22.25,49.75 36.5,49.75 v37,50.25 40.25,53.5 76.75,53.5 | v83.25,62.5 77.5,62.5 76.75,61.75 76.75,53.5 | 76.75,50.75 76.75,50 v77.5,50 | 76.75,50.75 76.75,53.5 | 76.75,50.75 81.25,50.75 84.75,47.25 98.75,47.25 v115,31 139.75,31 v148,22.75
32KHZ  (via drill 0.3)
  Top 0.15: v90.5,60.5 91.25,60.5 R2-PINH1.1 | v75.25,58 74.75,57.5 74.75,54.5 76.25,53 | 76.25,53 76.75,52.5 76.75,51.25 U3.1 | v19.25,46 19,46.25 19,47 U2.9 | 76.25,53 v76,52.75
  Bottom 0.15: v90.5,60.5 87,64 77.5,64 75.25,61.75 v75.25,58 | v19.25,46 19.75,46.5 46.75,46.5 53.25,40 63.25,40 v76,52.75
DN  (via drill 0.3)
  Top 0.15: v153.75,48.75 153.75,48 D1.4 | 162.25,53.5 162.75,54 162.75,54.5 163.5,54.5 J2.A7 | 162.25,53.5 v161.75,53 | 162.25,53.5 163.5,53.5 J2.B7
  Bottom 0.15: v153.75,48.75 157.03,52.03 157.03,52.26 157.77,53 v161.75,53
DP  (via drill 0.3)
  Top 0.15: 164.5,54.5 164.5,55 163.75,55 J2.B6 | 154.75,46 153.75,46 D1.6 | v154.75,46.25 154.75,46 | 164.5,54.5 165.5,53.5 v165.5,51.75 165.5,48 162.5,45 154.75,45 154.75,46 | 164.5,54.5 164.5,54 163.75,54 J2.A6
  Bottom 0.15: v154.75,46.25 159.5,51 | 165.5,51.5 v165.5,51.75
EPD_3V3  (via drill 0.3)
  Top 0.3: v73.5,34.75 72.75,34.75 Q2.2 | v77.25,34.75 78,34 78.25,34 78.25,34.25 C7.1 81.03,37.23 L1.2 | 80.75,15.5 81.25,15.5 J4.15 | 85.25,21 85.25,20.5 TP17.TP 85.25,21 | 85.25,21 v85.25,22.75 85.25,23.25 EPD_C5.1 | 80.75,15.5 80.75,16 84,19.25 84,19.75 85.25,21 | 80.75,15.5 J4.16
  Bottom 0.3: v73.5,34.75 v77.25,34.75 85.25,26.75 v85.25,22.75
EPD_3V3_C  (via drill 0.3)
  Top 0.3: 72.5,36.75 72,36.25 70,36.25 R_CL1.2 | v21.5,66.25 21.5,64.75 U2.18 | v67.25,86 67.5,86.25 80.28,86.25 TP13.TP | v72.5,67.5 72.5,36.75 | 72.5,36.75 Q2.1
  Bottom 0.3: v21.5,66.25 41.25,86 v67.25,86 71.59,86 72.5,85.09 v72.5,67.5
EPD_BUSY  (via drill 0.3)
  Top 0.15: v84.25,13.75 84.25,15.25 J4.9 | 11.5,63.75 11.25,64 U2.26 | 11.5,63.75 v12.75,62.5 | TP9.TP 11.5,75 11.5,63.75
  Bottom 0.15: v84.25,13.75 81,10.5 43,10.5 39.75,7.25 39.25,7.25 9.75,36.75 9.75,47.75 12.5,47.75 13,48.25 13,62.5 v12.75,62.5
EPD_CS  (via drill 0.3)
  Top 0.15: 71.48,11.77 80.02,11.77 82.75,14.5 82.75,15.25 J4.12 | 68.94,3.54 43.73,3.54 TP10.TP 40.5,6.5 39.5,7.5 v39.5,7.75 | R9.1 67.5,34.75 v68,34.25 69.5,32.75 73,32.75 73,31.75 D6.2 | v21.5,46 21.5,47 U2.11
  Top 0.152: 71.48,11.77 71.12,11.41 71.12,5.08 69.58,3.54 68.94,3.54
  Bottom 0.15: v21.5,46 23.25,44.25 30,44.25 | 30,44.25 46.25,44.25 56.25,34.25 v68,34.25 | v39.5,7.75 39.5,29.25 40.25,29.25 40.5,29.5 40.5,34 40.25,34 30,44.25
EPD_DC  (via drill 0.3)
  Top 0.15: v83.25,16.25 83.25,15.5 J4.11 | v64.75,26 64.25,26.5 63.5,26.5 | 63.5,26.5 61,24 23.83,24 6.42,41.41 6.42,42.41 7.26,43.25 8,43.25 8,48.75 8.75,49.5 13.75,49.5 13.75,47.25 U2.5 | 63.5,26.5 TP11.TP
  Bottom 0.15: v83.25,16.25 83.25,22.25 68.5,22.25 v64.75,26
EPD_RST  (via drill 0.3)
  Top 0.15: v83.75,16.75 83.75,15.5 J4.10 | v60.75,20.5 59.75,21.5 TP12.TP | v31.25,43.75 17.75,57.25 17.75,64.5 U2.21
  Bottom 0.15: v83.75,16.75 83.75,15.75 65.5,15.75 v60.75,20.5 54.5,20.5 v31.25,43.75
FLASH_CS  (via drill 0.3)
  Top 0.15: D9.2 38,49 38,48.75 37,47.75 R5.1 36.75,47.75 36.25,47.75 v35.75,48.25 35.75,56.5 36.5,56.5 U1.1 | v22.75,48.25 22.75,47.25 U2.12
  Bottom 0.15: v35.75,48.25 v22.75,48.25
GDR  (via drill 0.3)
  Top 0.15: v87.75,14.5 87.75,15.25 J4.2 | v69.5,14.25 69.25,14.5 69.25,15 R4.2 69,15.25 69,16.5 66.5,16.5 65.5,15.5 Q3.1
  Bottom 0.15: v87.75,14.5 87.5,14.25 v69.5,14.25
GND  (via drill 0.3, 0.35)
  Top 0.15: U2.29_5 14.5,54.5 14.5,55.5 U2.29_6 14.25,55.75 9.25,60.75 9.25,64 8.75,64.5 U2.28 2.42,70.92 2.42,80.86 J1.G3 | TP5.TP 7.75,42 8.5,42.75 8.5,47 U2.1 | v47.25,101 47.25,100.75 | v47.25,102.5 46.25,102.5 46.25,107.5 47,107.5 47,108.25 RESET_BUTTON.1 48.25,108.25 48.25,110 48.5,110 48.5,103.5 48.25,103.25 46.5,103.25 46.5,107.25 47.25,107.25 47.25,107.75 47.5,108 48.25,108 48.25,103.5 46.75,103.5 46.75,107 47.5,107 47.5,107.5 48,107.5 48,103.75 47,103.75 47,106.75 47.75,106.75 47.75,104 47.25,104 47.25,106.5 47.5,106.5 v47.5,104.25 | v50.5,107.25 50.75,107.5 RESET_BUTTON.2 | v31.25,105.25 28,108.5 C6.2 | v41.5,51 38.25,47.75 D9.1 | v46,52.75 46,56 45,57 40.75,57 40.75,54.75 U1.9 | 163.75,51 163.75,51.25 J2.B12 | 163.75,51 164,50.75 164,49.25 J2.MP3 | 163.75,51 J2.A1
  Bottom 0.15: v47.25,102.5 v47.25,101 | v50.5,107.25 v47.5,104.25 31.25,104.25 v31.25,105.25 | v41.5,51 43.25,52.75 v46,52.75
  other vias: 43.18,74.93 16.51,8.89 29.21,29.21 50.8,15.24 125.73,52.07 147.32,40.64 161.29,36.83 152.4,53.34 157.48,52.07 157.48,48.26 166.37,53.34 69.85,44.45 80.01,55.88 83.82,55.88 59.69,57.15 82.55,20.32 19.05,88.9 11.43,77.47 16.51,58.42 33.02,38.1 43.18,48.26 41.91,45.72 11.43,50.8 39.37,109.03 32.57,52.07
  pour Top: 72.35,11.49 72.37,11.51 94,11.51 94.02,11.49 94.04,11.47 94.06,11.45 94.06,1.35 168.83,1.35 168.83,65.96 91.42,65.96 91.4,65.98 91.38,66 91.36,66.02 91.36,110.41 1.35,110.41 1.35,66.12 8.91,66.12 8.93,66.1 8.95,66.08 8.97,66.06 8.97,45.7 8.95,45.68 8.93,45.66 8.91,45.64 1.35,45.64 1.35,1.35 72.31,1.35 72.31,11.45 72.33,11.47
  pour Top: 72.35,11.49 72.37,11.51 94,11.51 94.02,11.49 94.04,11.47 94.06,11.45 94.06,1.35 168.83,1.35 168.83,65.96 91.42,65.96 91.4,65.98 91.38,66 91.36,66.02 91.36,110.41 1.35,110.41 1.35,1.35 72.31,1.35 72.31,11.45 72.33,11.47
  pour Bottom: 8.95,45.68 8.93,45.66 8.91,45.64 1.35,45.64 1.35,1.35 72.31,1.35 72.31,11.45 72.33,11.47 72.35,11.49 72.37,11.51 94,11.51 94.02,11.49 94.04,11.47 94.06,11.45 94.06,1.35 168.83,1.35 168.83,65.96 91.42,65.96 91.4,65.98 91.38,66 91.36,66.02 91.36,110.41 1.35,110.41 1.35,66.12 7.64,66.12 7.66,66.1 8.95,64.81 8.97,64.79 8.97,45.7
GPIO8
  Top 0.15: R1.2 21.5,45.25 20.25,45.25 20.25,47 U2.10
I2C_PW  (via drill 0.3)
  Top 0.15: C1.1 156.25,5.75 157.25,5.75 C2.1 157.5,5.75 R1-PINH.2 | R1-PINH.2 R2-PINH.2 | SENSOR2.8 157.25,12.75 156.75,12.75 156.25,12.25 156.25,11 157.25,11 SENSOR2.6 157.5,11 158,11 158.5,11.5 | 158.5,11.5 158.5,11.75 v159.25,11.75 160,11.75 SENSOR2.2 | 23,65.5 23,65 22.75,64.75 U2.17 | R1-PINH.2 158.5,7.25 158.5,11.5
  Top 0.3: v24.75,67.25 23,65.5
  Bottom 0.15: v24.75,67.25 25,67 89.46,67 99.21,57.25 163.5,57.25 167.25,53.5 167.25,12.7 166.37,11.82 166.37,11.75 v159.25,11.75
INT_RTC  (via drill 0.3)
  Top 0.15: R1-PINH1.1 82,63.5 82,62.25 82.5,61.75 82.5,53.75 81.25,52.5 v81.25,50 81,49.75 80,49.75 80,50.25 79.5,50.75 79.5,51 U3.3 | 18.5,39.25 21.5,36.25 21.5,35.75 TP15.TP | 18.5,39.25 17.75,40 17.75,47 U2.8 | 18.5,39.25 v24,44.75
  Bottom 0.15: v81.25,50 70.75,39.5 51.5,39.5 46.25,44.75 v24,44.75
IO/BOOT  (via drill 0.3)
  Top 0.15: 25.75,109.75 25.75,110 27.75,110 C6.1 | 20.5,108.75 21.5,109.75 22.16,109.75 | v21,72 25.25,67.75 25.25,64.75 U2.15 | v21.25,107 21.25,107.75 21,108 21,108.25 20.5,108.75 | 20.5,108.75 R_BOOT.2 | 22.16,109.75 25.75,109.75 | 25.75,109.75 BOOT_BUTTON.3 | 22.16,109.75 BOOT_BUTTON.4
  Bottom 0.15: v21,72 21,107 v21.25,107
IO/CHANGE  (via drill 0.3)
  Top 0.15: C10.1 67.25,109.75 CHANGE_BUTTON.3 CHANGE_BUTTON.4 61.25,109.75 | 61.25,109.75 61,109.75 R_CHANGE.2 61.25,109.75 | v16.5,66.75 15.25,65.5 15.25,64.75 U2.23 | v60.5,110.75 61.25,110 61.25,109.75
  Bottom 0.15: v60.5,110.75 v16.5,66.75
MISO  (via drill 0.3)
  Top 0.15: R8.1 38.25,31.25 38.25,33.5 D12.2 38,33.5 35.32,36.18 35.32,56.46 35.63,56.78 36.05,56.78 36.52,57.25 | U1.2 37.75,56.25 37.75,56.75 37.25,57.25 36.52,57.25 | 36.52,57.25 v33.5,57.25 33.5,57 33.25,56.75 33.25,56 TP6.TP | v10.25,63.5 10.25,64.25 10,64.5 U2.27 9.75,64.75 9.75,65.25 3.75,71.25 3.75,93 4.5,93 5,93.5 J1.P7
  Bottom 0.15: v10.25,63.5 10.75,63 27.75,63 v33.5,57.25
MOSI  (via drill 0.3)
  Top 0.15: v80.75,13.75 81.75,14.75 81.75,15.25 J4.14 | v42.75,30.75 42.5,31 42,31 R7.1 42,31.25 42,33.5 D11.2 42,33.75 v42.75,33.75 | v44.75,52 44.75,52.5 U1.5 | v53.5,40.5 54.5,39.5 TP7.TP 54.5,39.25 v52.5,37.25 | v21.5,48.25 16.75,48.25 16.5,48 16.5,47.25 U2.7 16.25,47.25 16.25,48 v12.5,51.75 | v9.25,89.25 5,89.25 J1.P3
  Bottom 0.15: v80.75,13.75 59.75,13.75 v42.75,30.75 | 47.5,49.25 53.5,43.25 v53.5,40.5 | 47.5,49.25 v44.75,52 | v21.5,48.25 22.5,49.25 47.5,49.25 | v9.25,89.25 9.25,51.75 v12.5,51.75 | v42.75,33.75 46.25,37.25 v52.5,37.25
N$1
  Top 0.15: 118,30.75 120,32.75 120.5,32.75 IC4.1 | 118,30.75 117.5,30.25 117.5,29.25 C1_BAT1.1 | 118,30.75 120.5,30.75 IC4.3 120.75,30.75 122.5,30.75 122.5,30.25 125.27,27.48 | 131,30.75 131,31.5 131.75,32.25 131.75,38.25 Q1.2 | 131,30.75 D2.1 | 131,30.75 131,28.75
  Top 0.152: 125.27,27.48 129.73,27.48 131,28.75
N$2
  Top 0.15: MCP73831.1 126.25,43.5 125.75,44 125.75,44.25 123.75,44.25 123.5,44 123.5,43.5 119.5,43.5 118.75,44.25 R1_BAT.1
N$3
  Top 0.15: CHG_LED.C 118.75,46.75 120,45.5 120,44.5 R1_BAT.2
N$4  (via drill 0.3)
  Top 0.15: v153.5,42 154.25,42 R2-USB.1 | v162,50.5 161.25,51.25 161.25,54.5 162.25,55.5 162.25,56 163.5,56 J2.B5
  Bottom 0.15: v162,50.5 v153.5,42
N$5
  Top 0.15: R2_BAT.2 125.5,40.25 125.5,42.25 124.5,43.25 124.5,43.5 MCP73831.5
N$6
  Top 0.15: R_CAPACITOR.2 91.25,50.25 86.5,50.25 86.5,61.75 85.5,62.75 85.5,63.5 D7.1
N$7
  Top 0.15: IC1.5 51,102.5 52.5,101 53.25,101 C_DELAY.1
N$10
  Top 0.15: J4.5 86.25,15.5 86.25,19.5 86.5,19.75 86.5,23.25 EPD_C2.1
N$11  (via drill 0.3)
  Top 0.15: v156.75,43.25 155.75,43.25 R2-USB1.2 | v164.75,53.5 164.75,53 163.75,53 J2.A5
  Bottom 0.15: v164.75,53.5 165,53.5 166.6,51.9 166.6,50.39 162.75,46.54 160.04,46.54 v156.75,43.25
N$12
  Top 0.15: J4.4 86.75,15.5 86.75,19.5 87.5,20.25 87.5,23.25 EPD_C1.1
N$13
  Top 0.15: J4.18 79.75,15.5 79.75,15.75 81,17 81,23.25 81.25,23.5 EPD_C6.1
N$14
  Top 0.15: J4.19 79.25,15.5 79.25,22.5 79.75,23 79.75,23.25 80,23.5 EPD_C7.1
N$17
  Top 0.15: J4.20 78.75,15.5 78.75,23.25 EPD_C8.1
N$19
  Top 0.15: J4.22 77.75,15.5 77.75,21.75 76.5,23 76.5,23.25 76.25,23.5 EPD_C10.1
N$21
  Top 0.15: J4.24 76.75,15.5 71.5,15.5 71.5,15.75 69.75,17.5 68.75,17.5 68.75,18.25 EPD_C12.1
N$45
  Top 0.15: 87.75,38.75 88.75,38.75 C4.1 | 87.75,38.75 87.75,39 87.5,39.25 87,39.25 D3.2 | 87.75,38.75 85,36 85,35.75 83.5,35.75 D4.1
PREVGH  (via drill 0.3)
  Top 0.3: J4.21 78.25,15.5 78.25,22.25 v77.75,22.75 77.5,23 77.5,23.25 EPD_C9.1 | v78.25,42.75 78.25,43 77,44.25 D5.1
  Bottom 0.3: v78.25,42.75 72.75,37.25 72.75,22.75 v77.75,22.75
PREVGL
  Top 0.3: 74.75,18.5 77.25,16 77.25,15.5 J4.23 | 74.75,18.5 70,18.5 EPD_C11.1 | 74.75,18.5 74.75,25 85.25,35.5 86.75,35.5 D4.2
RESE  (via drill 0.3)
  Top 0.15: v87.25,16.25 87.25,15.5 J4.3 | Q3.2 66.75,15.5 66.75,15.75 67,15.75 v67.5,15.25 67.5,11 R3.2
  Bottom 0.15: v87.25,16.25 86.25,15.25 v67.5,15.25
RESE'
  Top 0.15: R2.2 65.5,12.5 65.5,10.25 SJ1.2 65.75,10 65.75,9.5 67.25,9.5 R3.1
RESET
  Top 0.15: 49.75,109.25 50,109.5 50.75,109.5 RESET_BUTTON.3 52,109.75 C5.1 | 49.75,109.25 49.5,109 49.5,104 48.25,102.75 IC1.1 | RESET_BUTTON.4 45.75,109.75 R_RESET.2 | R_RESET.2 45.5,110 45.5,110.75 48.25,110.75 49.75,109.25 | R_RESET.2 33.02,97.13 33.02,57.58 31.82,56.38 31.82,55.38 33.02,54.18 33.02,44.77 22.61,34.36 21.09,34.36 12.52,42.93 12.52,45.64 11.87,46.3 11.87,46.51 U2.3
RTC_RST  (via drill 0.3)
  Top 0.15: v24.25,63.5 24.25,64.25 24,64.5 U2.16 | v75.25,57.25 80,52.5 80,52.25 80.5,51.75 80.5,51.25 U3.4
  Bottom 0.15: v24.25,63.5 69,63.5 v75.25,57.25
RX
  Top 0.15: U2.24 14,64.75 14,68.25 20.75,75 20.75,75.75 20.5,76 TP2.TP
SCK  (via drill 0.3)
  Top 0.15: v82.25,16.25 82.25,15.5 J4.13 | v54.75,24.5 54,25.25 53.5,25.25 TP8.TP 53.25,25.5 45,33.75 | 44.5,33.25 44.5,33.5 D10.2 44.5,33.25 | 44.5,33.25 44.5,31.25 R6.1 | 45.5,54 44.75,54 U1.6 | 45.5,54 45.5,34.25 45,33.75 | 44.5,33.25 45,33.75 | v15.25,48.25 15.25,47.25 U2.6 | 45.5,54 v45.5,55 | v16,62.5 v16,63.5 | v9.25,91.25 5,91.25 J1.P5
  Bottom 0.15: v82.25,16.25 76.75,21.75 57.5,21.75 v54.75,24.5 | v15.25,48.25 22,55 23.5,55 | v45.5,55 23.5,55 | v16,63.5 16,77.75 9.75,84 9.75,90.75 v9.25,91.25 | 23.5,55 v16,62.5
SCL  (via drill 0.3)
  Top 0.15: v19,65.75 19,64.75 U2.20 | v74,64.5 76.75,61.75 76.75,61.5 | 76.75,61.5 76.75,60.75 U3.16 76.75,61.5 | R2-PINH.1 160.25,5.75 161,5.75 v161,9.25 160.25,10 SENSOR2.4 | v162.25,21.5 163,20.75 165.02,20.75 J3.4 | U4.7 137,46 v137.75,46 137.75,47.5 v137.5,47.75 | 76.75,61.5 77.25,61.5 v77.5,61.75
  Bottom 0.15: v19,65.75 20.25,64.5 v74,64.5 | v162.25,21.5 158.75,25 | 158.75,25 v137.75,46 | v161,9.25 158.75,11.5 158.75,25 | v137.5,47.75 91.5,47.75 83.82,55.43 83.63,55.43 83.37,55.69 83.37,55.88 v77.5,61.75
SDA  (via drill 0.3)
  Top 0.15: v20.25,65.75 20.25,64.75 U2.19 | v74,65.75 77.5,62.25 78,62.25 78,62 | 78,62 78,60.75 U3.15 | 161,11 160.25,11 SENSOR2.3 | v137,48.25 137,46.5 U4.8 | J3.3 165.27,19.5 166.02,19.5 v166.27,19.75 166.27,16.27 161,11 | 78,62 78.75,62 v78.75,61.75 | 161,11 161.43,10.57 161.43,5.79 160.79,5.15 159.3,5.15 R1-PINH.1
  Bottom 0.15: v74,65.75 v20.25,65.75 | v166.27,19.75 152.25,33.77 152.25,43.75 147.75,48.25 v137,48.25 92.25,48.25 v78.75,61.75
SRC
  Top 0.15: C4.2 88.75,40 87.75,40 83.5,44.25 80.5,44.25 D5.2 80.25,44.25 80.25,43.75 77.94,41.44 | 77.94,41.44 76.25,39.75 76.25,33.25 66,23 66,17.75 Q3.3 | L1.1 76.45,40.64 78.74,40.64 77.94,41.44
SS_SD  (via drill 0.3)
  Top 0.15: 10.5,96.73 13.97,96.73 15.99,98.75 D8.2 15.75,99 | R10.1 9,99.5 v9.75,98.75 10.5,98 10.5,96.73 | v12.25,48.25 12.25,47.5 12.5,47.25 U2.4 | 10.5,96.73 10.5,89.75 9.25,88.5 5.75,88.5 5.5,88.25 J1.P2
  Bottom 0.15: v12.25,48.25 12,48.5 8.75,48.5 8,49.25 8,96.25 9.75,98 v9.75,98.75
TX
  Top 0.15: U2.25 12.75,64.75 12.75,72.5 17.75,77.5 17.75,78.5 TP1.TP
USB_D+  (via drill 0.3)
  Top 0.15: v155.25,45.5 155.25,46 156,46 D1.1 | v23.75,50.5 25,49.25 25,47.25 U2.14
  Bottom 0.15: v155.25,45.5 155,45.75 150.75,45.75 140.25,56.25 90.25,56.25 83.5,63 77.5,63 76.25,61.75 76.25,54 27.25,54 v23.75,50.5
USB_D-  (via drill 0.3)
  Top 0.15: v155,48 156,48 D1.3 | v21.75,50 23.75,48 23.75,47.25 U2.13
  Bottom 0.15: v155,48 154.75,48.25 148.75,48.25 140.25,56.75 90.25,56.75 83.5,63.5 77.5,63.5 75.75,61.75 75.75,54.5 26.25,54.5 v21.75,50
VBAT
  Top 0.15: 132.27,45.5 131.75,45.5 131,46.25
  Top 0.3: 131.75,40.62 | 131.75,40.62 131.75,41.5 132,41.75 TP3.TP 133.52,42.67 133.52,45.5 | 131.75,40.62 Q1.3 | U4.2 135,46 135,45.5 U4.3 134.75,45.5 133.52,45.5 | MCP73831.3 127.25,45.5 127.25,46.25 130.75,46.25 C2_BAT.1 131,46.25 | 133.52,45.5 132.27,45.5
VBUS  (via drill 0.3)
  Top 0.3: 152.5,47.5 151.25,47.5 C4_USB.1 | 152.5,47.25 152.5,47.5 | 152.5,47.25 152.75,47 153.5,47 D1.5 | 152.5,47.5 152.5,49.5 153.75,49.5 154.25,49 158.75,49 C5_USB.1 | 152.5,47.25 152.5,43.5 | 152.5,43.5 152.5,41.5 155.75,38.25 PFMF.050.1.2 | Q1.1 130,38.25 v130,36.25 130,34.25 130.75,33.5 130.75,33 D2.2 | MCP73831.4 124.25,45.5 v124.25,46.25 125,47 120.25,47 CHG_LED.A 119.82,46.99 119.14,47.67 118.11,47.67 117.18,46.73 114.73,46.73 113.75,45.75 C1_BAT.1 113.5,45.5 113.5,45 109,40.5 | 109,40.5 109,55.71 TP14.TP | 109,40.5 109,32.5 R1_PWRUSB.2 | v151.75,43.5 152.5,43.5
  Bottom 0.3: 130,46.25 v130,36.25 | v124.25,46.25 130,46.25 | v151.75,43.5 148.5,46.75 130.5,46.75 130,46.25
VRTC  (via drill 0.3)
  Top 0.3: 92.5,49.25 93.75,49.25 93.75,49.5 C10_SUPERCAP.2 | 92.5,49.25 89,49.25 | 89,49.25 86.25,49.25 86,49 86,48.75 85.75,48.5 C8.1 | 92.5,49.25 92.5,51.5 91.5,51.5 R_CAPACITOR.1 | v79.5,59 79.5,60.5 U3.14 | 89,49.25 v89,49.5
  Bottom 0.3: v89,49.5 v79.5,59
VUSB  (via drill 0.3)
  Top 0.3: 162.5,56.75 162.5,57 | v162.5,52.5 162.75,52.25 162.75,51.75 | v152.75,40 151.5,38.75 151.5,38.25 PFMF.050.1.1 | 162.5,56.75 160.75,55 160.75,51 162,49.75 162.75,49.75 162.75,51.75 | J2.B9 163.75,52 J2.A4 162.75,51.75 | J2.B4 163.75,56.5 163.75,56.75 J2.A9 163.5,56.75 162.5,56.75
  Bottom 0.3: 162.5,56.75 v162.5,52.5 165.5,52.5 166.25,51.75 166.25,50.75 165.25,50.75 161.75,47.25 160,47.25 v152.75,40
(copper drawn outside any net)
  shapes: Top area x13